# EAGLE board BOARD (EAGLE 9.1.0)
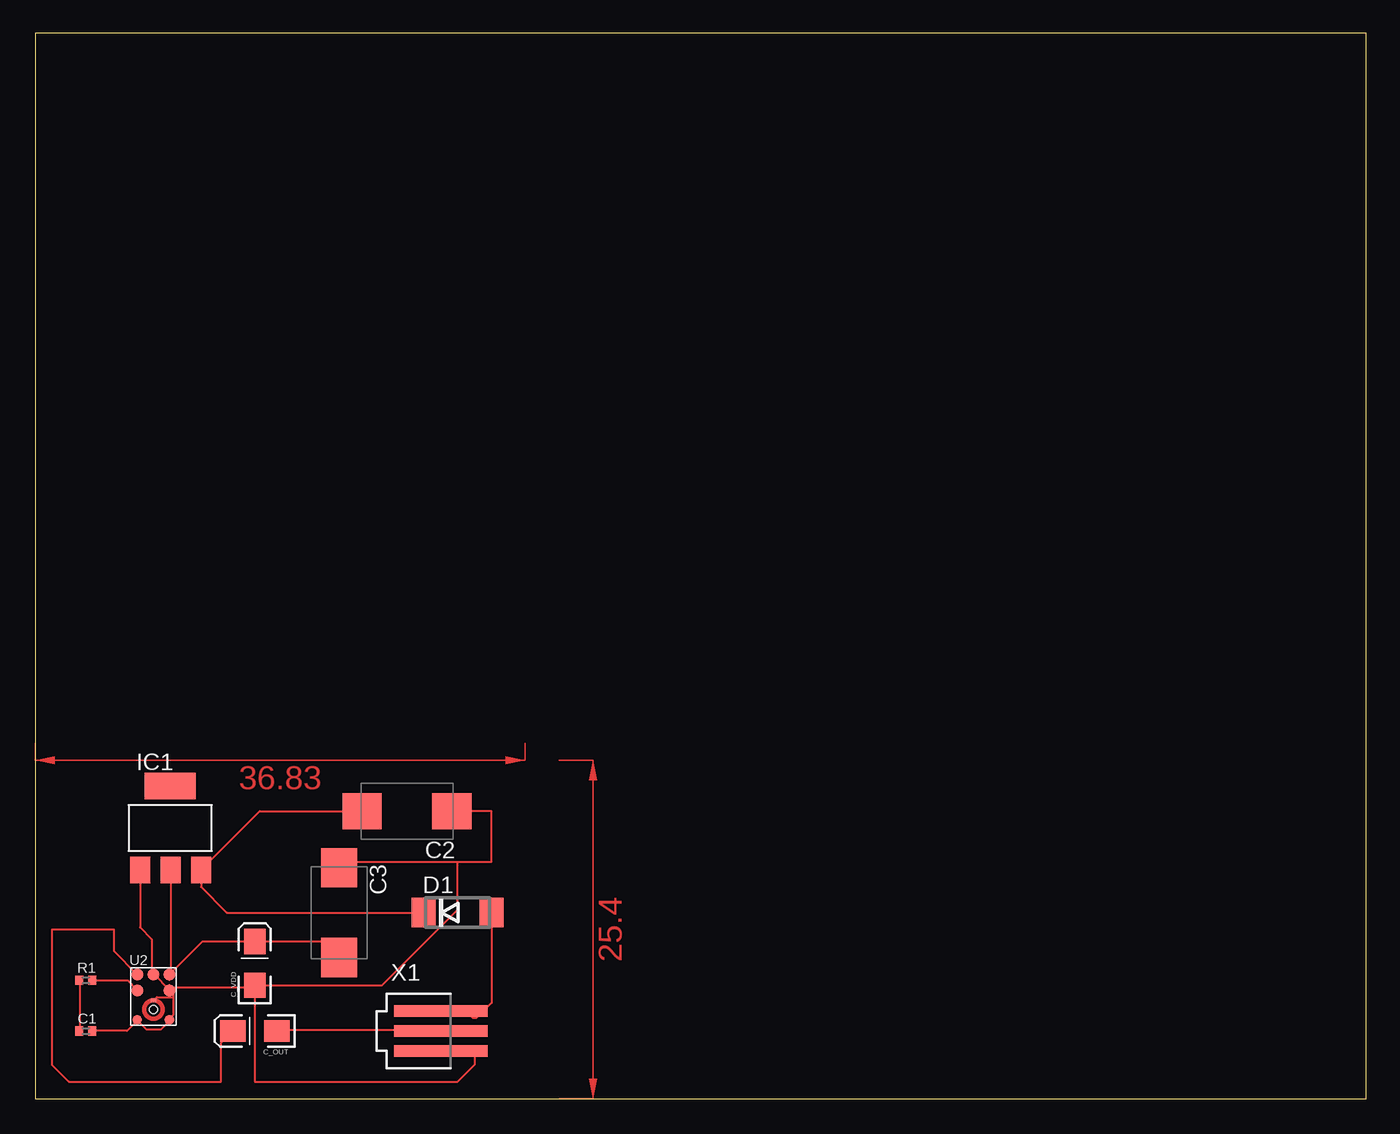
[diagram p0: board, top side]

Size 100 x 80 mm. Coordinates in mm from the lower left corner, seen from the top.
Outline: 0,0 100,0 100,80 0,80 0,0
Copper layers (1*16): Top 0.035mm / dielectric 1.5mm / Bottom 0.035mm
Design rules "default": minimum track width 6mil, minimum drill 0.35mm, track to track 6mil, track to pad 6mil, pad to pad 6mil, via to via 6mil, smd to smd 6mil, copper to edge 40mil, drill to drill 6mil, minimum pad ring 10mil, minimum via ring 8mil, stop-mask expansion 4mil, vias tented up to drill 0mil, thermal gap 10mil
Net classes: 0 default: width 0.152 mm, drill 0.305 mm, clearance 0.152 mm

## Footprints (pad centres in the part's own frame; a part is rotated, then mirrored left to right if it is on the bottom)
0402 = smd 0.6 x 0.7: 1 -0.5,0; 2 0.5,0
D/7343-31W = smd 2.95 x 2.7: + 3.375,0; - -3.375,0
EIA3216-KIT = smd 1.9 x 1.6: A 1.65,0; C -1.65,0
DO214AA = smd 1.8 x 2.2: A 2.55,0; C -2.55,0
SOT223 = smd 1.499 x 2.007: 1 -2.261,-3.15; 2 0.025,-3.15; 3 2.311,-3.15 | smd 3.81 x 2.007: 4 0,3.15
SPM0408LE5H-TB = smd 0.9 x 0.9: P$1 -1.2,1.7; P$2 -1.2,0.506; P$5 1.208,0.506; P$6 1.208,1.7; P$7 0.004,1.7 | smd 0.7 x 0.7: P$3 -1.2,-1.706; P$4 1.208,-1.706 | smd 0.406 x 0.203: P$8 0,-0.26 | hole 0.6: 0.004,-0.916
87438-03 = smd 7 x 0.85: 1 0,1.5; 2 0,0; 3 0,-1.5

## Placement (x,y rotation side)
C1  1u  [0402]  3.81,5.08 0 top
C2  10uf  [D/7343-31W]  27.94,21.59 180 top
C3  10uf  [D/7343-31W]  22.86,13.97 270 top
C_OUT  10u  [EIA3216-KIT]  16.51,5.08 180 top
C_VDD  .1u  [EIA3216-KIT]  16.51,10.16 90 top
D1  [DO214AA]  31.75,13.97 0 top
IC1  REG1117  [SOT223]  10.16,20.32 0 top
R1  0R  [0402]  3.81,8.89 0 top
U2  SPM0408LE5H  [SPM0408LE5H-TB]  8.89,7.62 0 top
X1  87438-03  [87438-03]  30.48,5.08 0 top

## Library data of the parts
C1 R1 = Perfect_0402
C2 C3 = rcl; SPICEPREFIX: C
C_OUT = SparkFun-Passives; MF: AVX; MPN: 0603ZD106MAT2A; OC_FARNELL: 1867954
C_VDD = SparkFun-Passives; MF: VISHAY SPRAGUE; MPN: 293D106X96R3A2TE3; OC_FARNELL: 1754143
D1 = diode
IC1 = burr-brown; MPN: REG1117; OC_FARNELL: 1097566; OC_NEWARK: 14P6981
U2 = acousticLib
X1 = con-molex; MF: MOLEX; OC_FARNELL: 1711328; OC_NEWARK: unknown

## Nets
GND: C1.2 C2.- C3.- C_VDD.C IC1.1 U2.P$3 U2.P$4 U2.P$5 U2.P$7 U2.P$8 X1.3
MIC_OUTPUT: C_OUT.C X1.2
N$1: C2.+ D1.C IC1.3
N$2: C3.+ C_VDD.A IC1.2 U2.P$6
N$8: C_OUT.A U2.P$1
N$35: R1.2 U2.P$2
N$36: C1.1 R1.1
VDD: D1.A X1.1

## Tracks (layer width: path | path; a pad name or v marks a point on that pad's centre or on a via)
GND
  Top 0.152: C1.2 6.91,5.08 7.62,5.79 U2.P$3 7.77,5.79 8.38,5.18 9.45,5.18 10.06,5.79 U2.P$4 10.21,5.94 10.21,6.1 10.36,6.25 10.36,7.62 | 10.36,7.62 10.36,7.92 10.21,8.08 U2.P$5 | U2.P$5 10.06,8.23 8.99,9.3 U2.P$7 8.77,9.45 8.77,11.99 7.9,12.85 IC1.1 | C_VDD.C 16.46,8.38 10.36,8.38 10.21,8.23 U2.P$5 | 16.61,8.38 C_VDD.C | U2.P$8 9.15,7.62 10.36,7.62 | C_VDD.C 16.51,1.27 31.75,1.27 33.02,2.54 33.02,3.81 32.79,3.58 X1.3 | C_VDD.C 26.06,8.51 31.75,14.2 31.75,17.78 | C3.- 21.71,17.78 31.75,17.78 | 31.75,17.78 34.29,17.78 34.29,21.59 C2.-
MIC_OUTPUT
  Top 0.152: C_OUT.C 18.29,5.18 30.38,5.18 X1.2
N$1
  Top 0.152: D1.C 14.4,13.97 12.47,15.9 IC1.3 16.89,21.59 C2.+
N$2
  Top 0.152: IC1.2 10.19,9.41 U2.P$6 12.59,11.81 C_VDD.A 21.64,11.81 C3.+
N$8
  Top 0.152: 7.62,9.45 U2.P$1 5.92,11.09 5.92,12.7 1.27,12.7 1.27,2.54 2.54,1.27 13.97,1.27 13.97,4.19 C_OUT.A 14.78,5.03
N$35
  Top 0.152: R1.2 4.42,8.84 7.01,8.84 7.62,8.23 U2.P$2
N$36
  Top 0.152: C1.1 3.35,5.08 3.35,8.84 R1.1
VDD
  Top 0.152: X1.1 32.36,6.58 32.89,6.04 33.15,6.04 34.3,7.2 D1.A
(copper drawn outside any net)
  shapes: Top area x2